# EAGLE board p8x-memory-card-full (EAGLE 9.6.2)
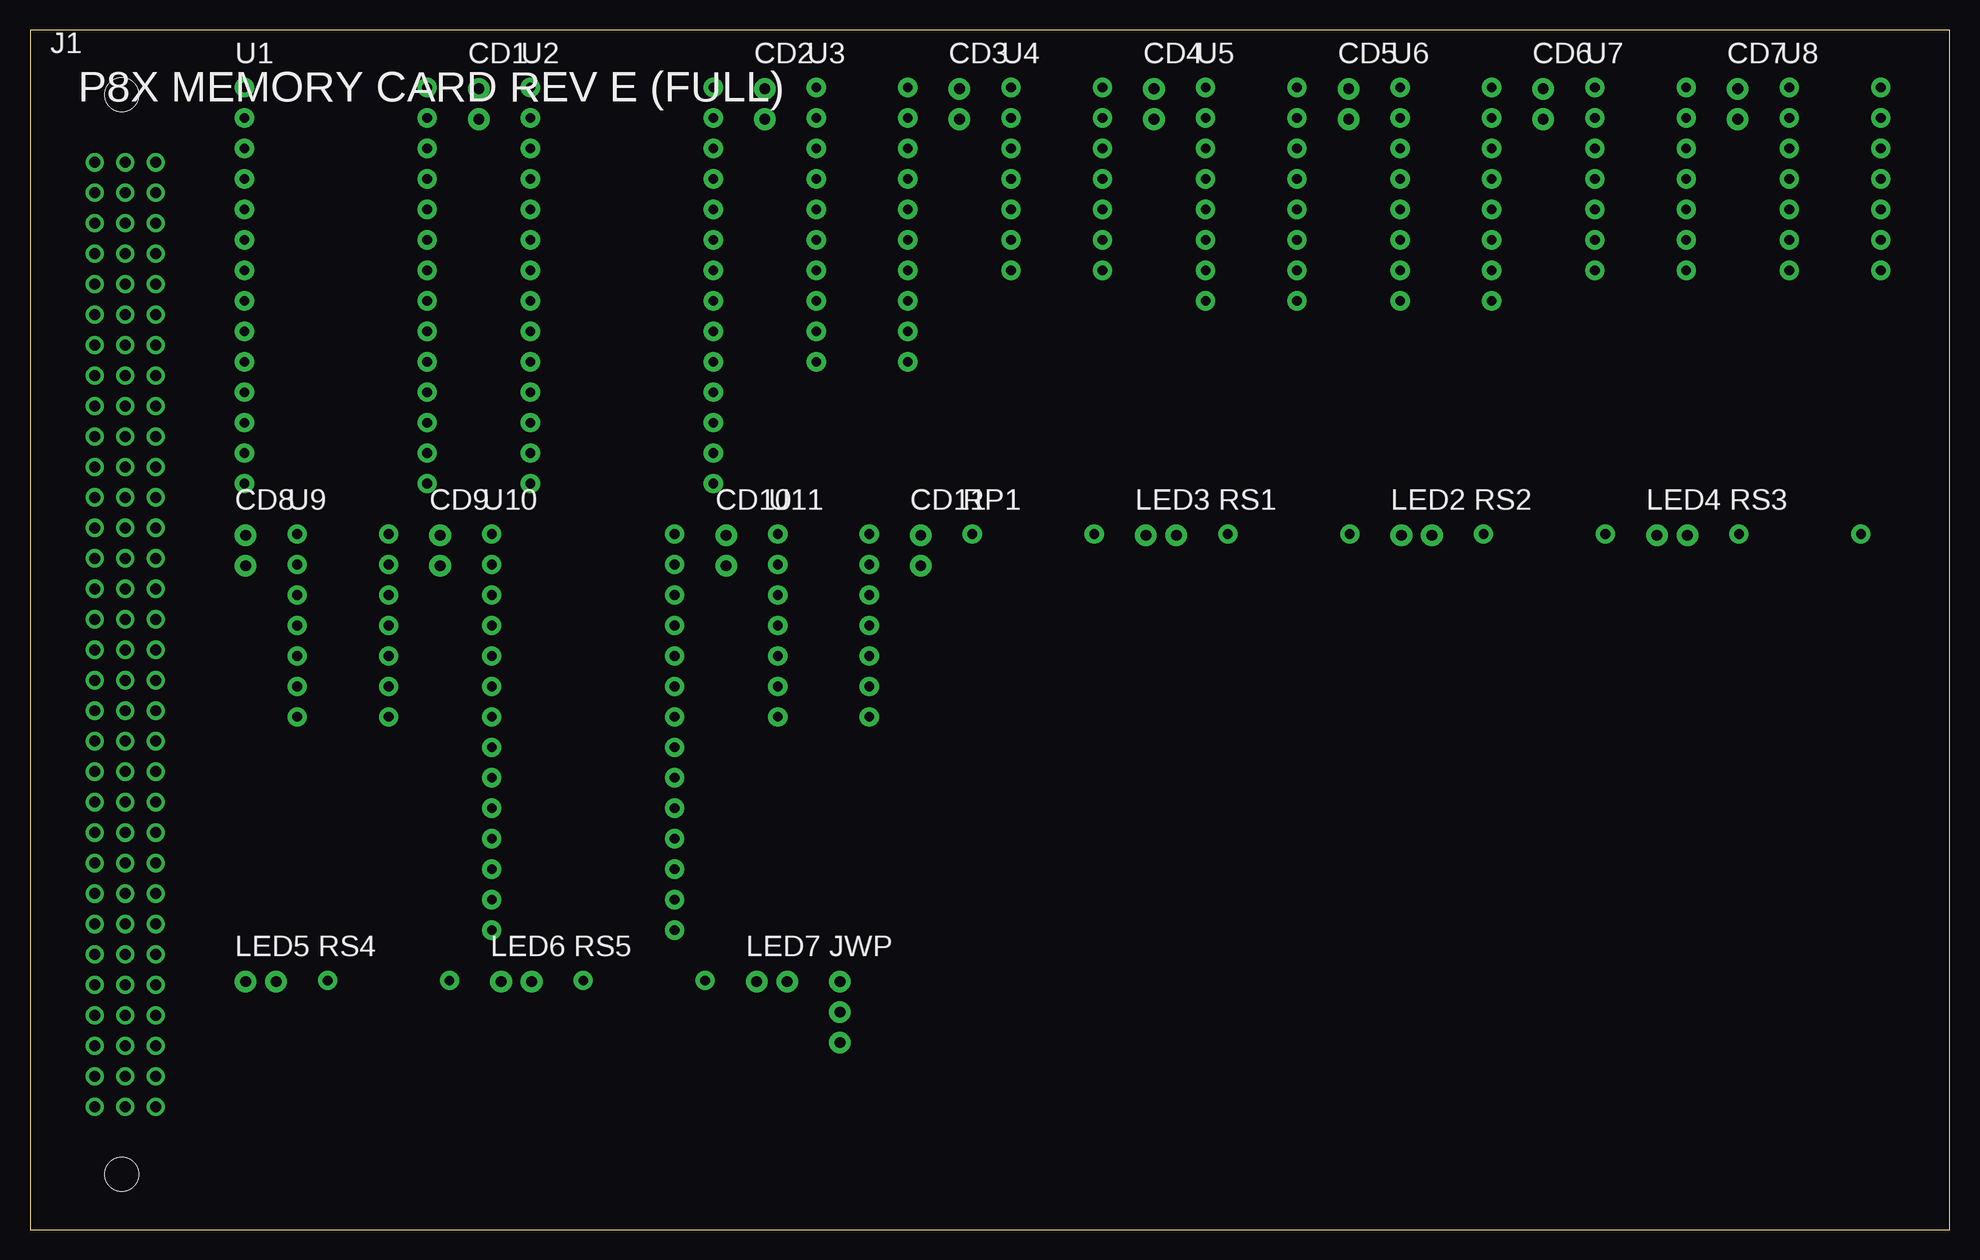
[diagram p0: board, top side]
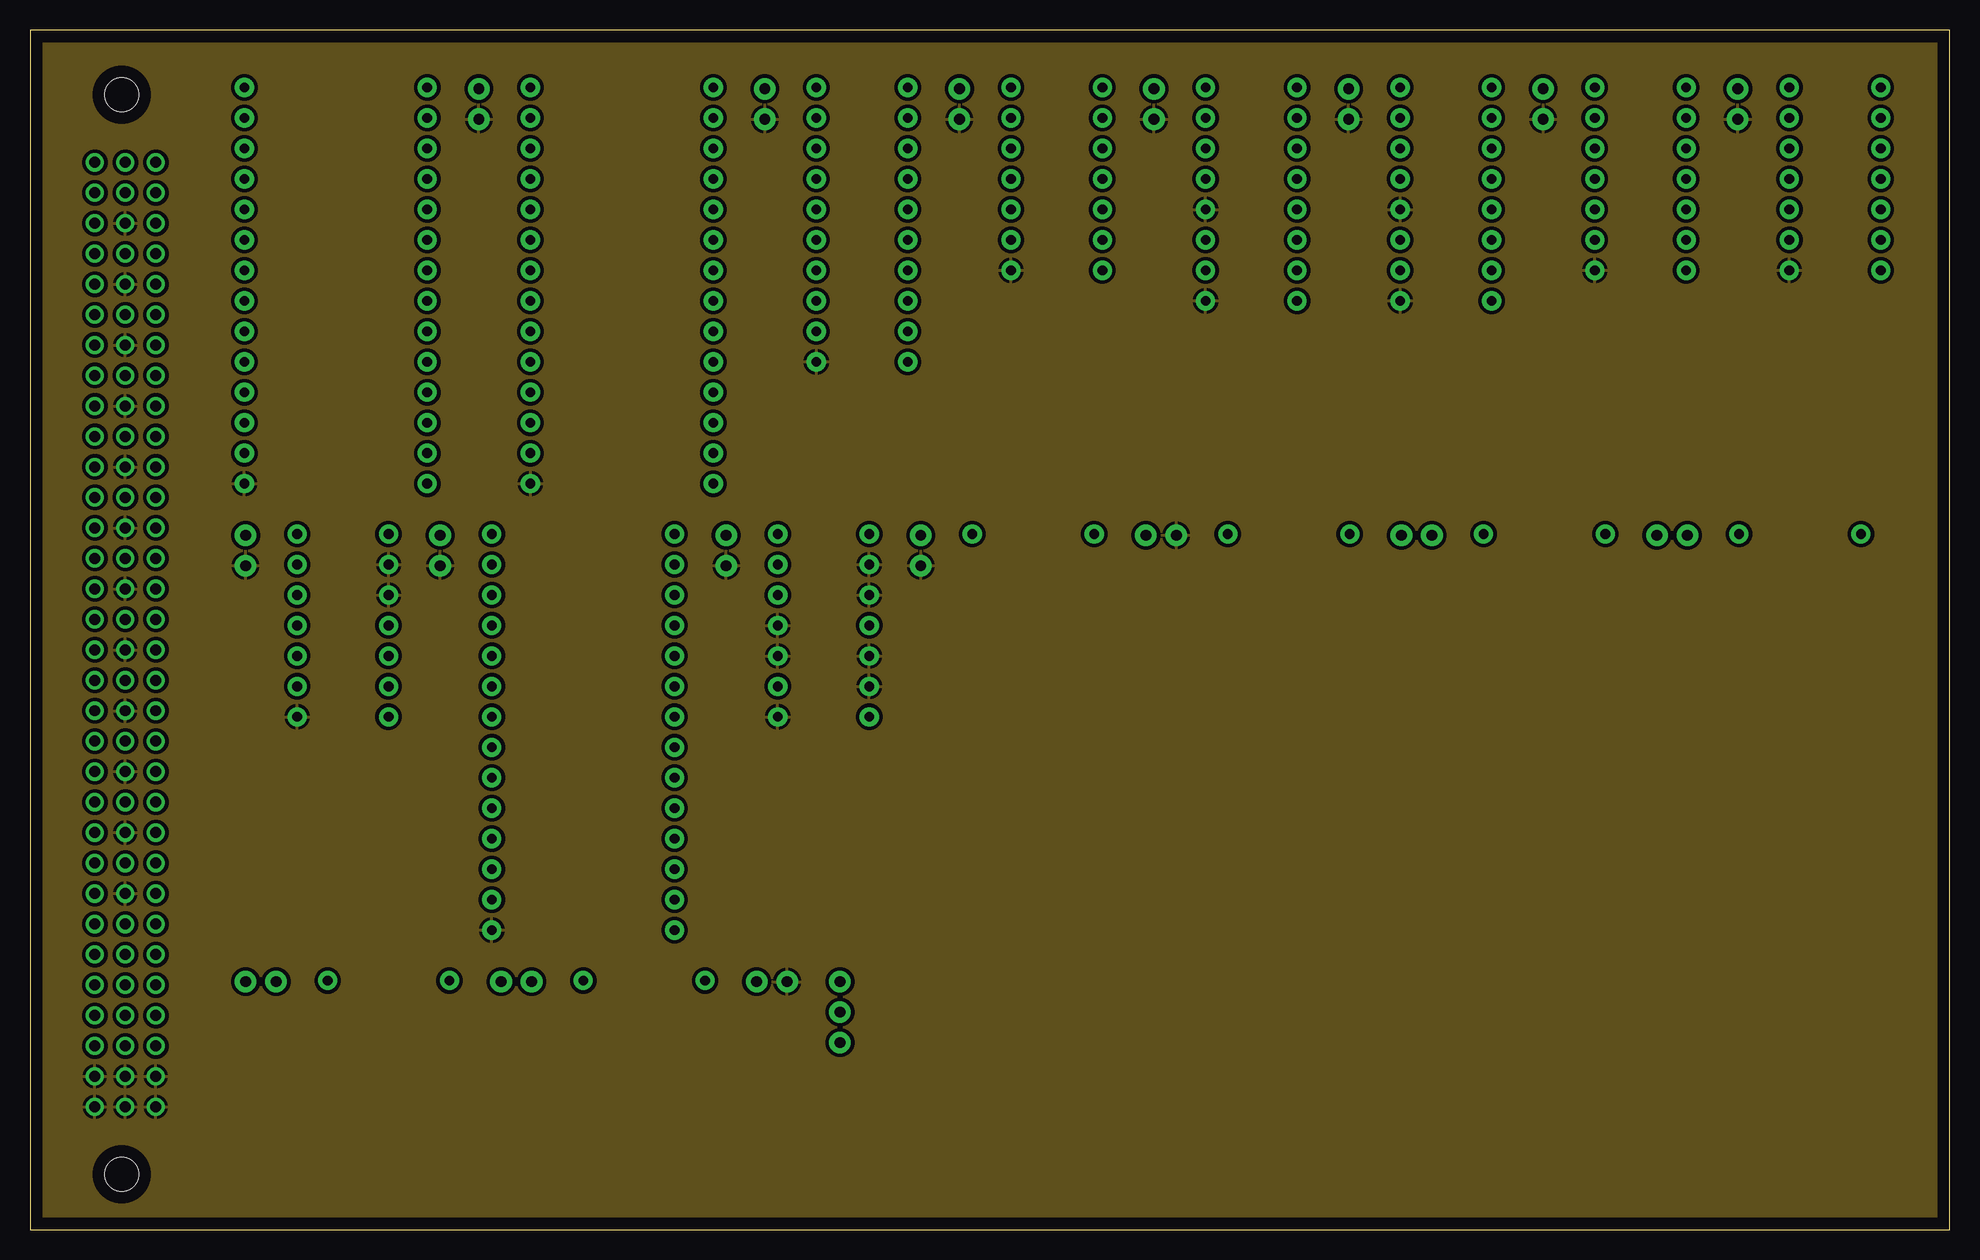
[diagram p1: board, inner layer Route2]
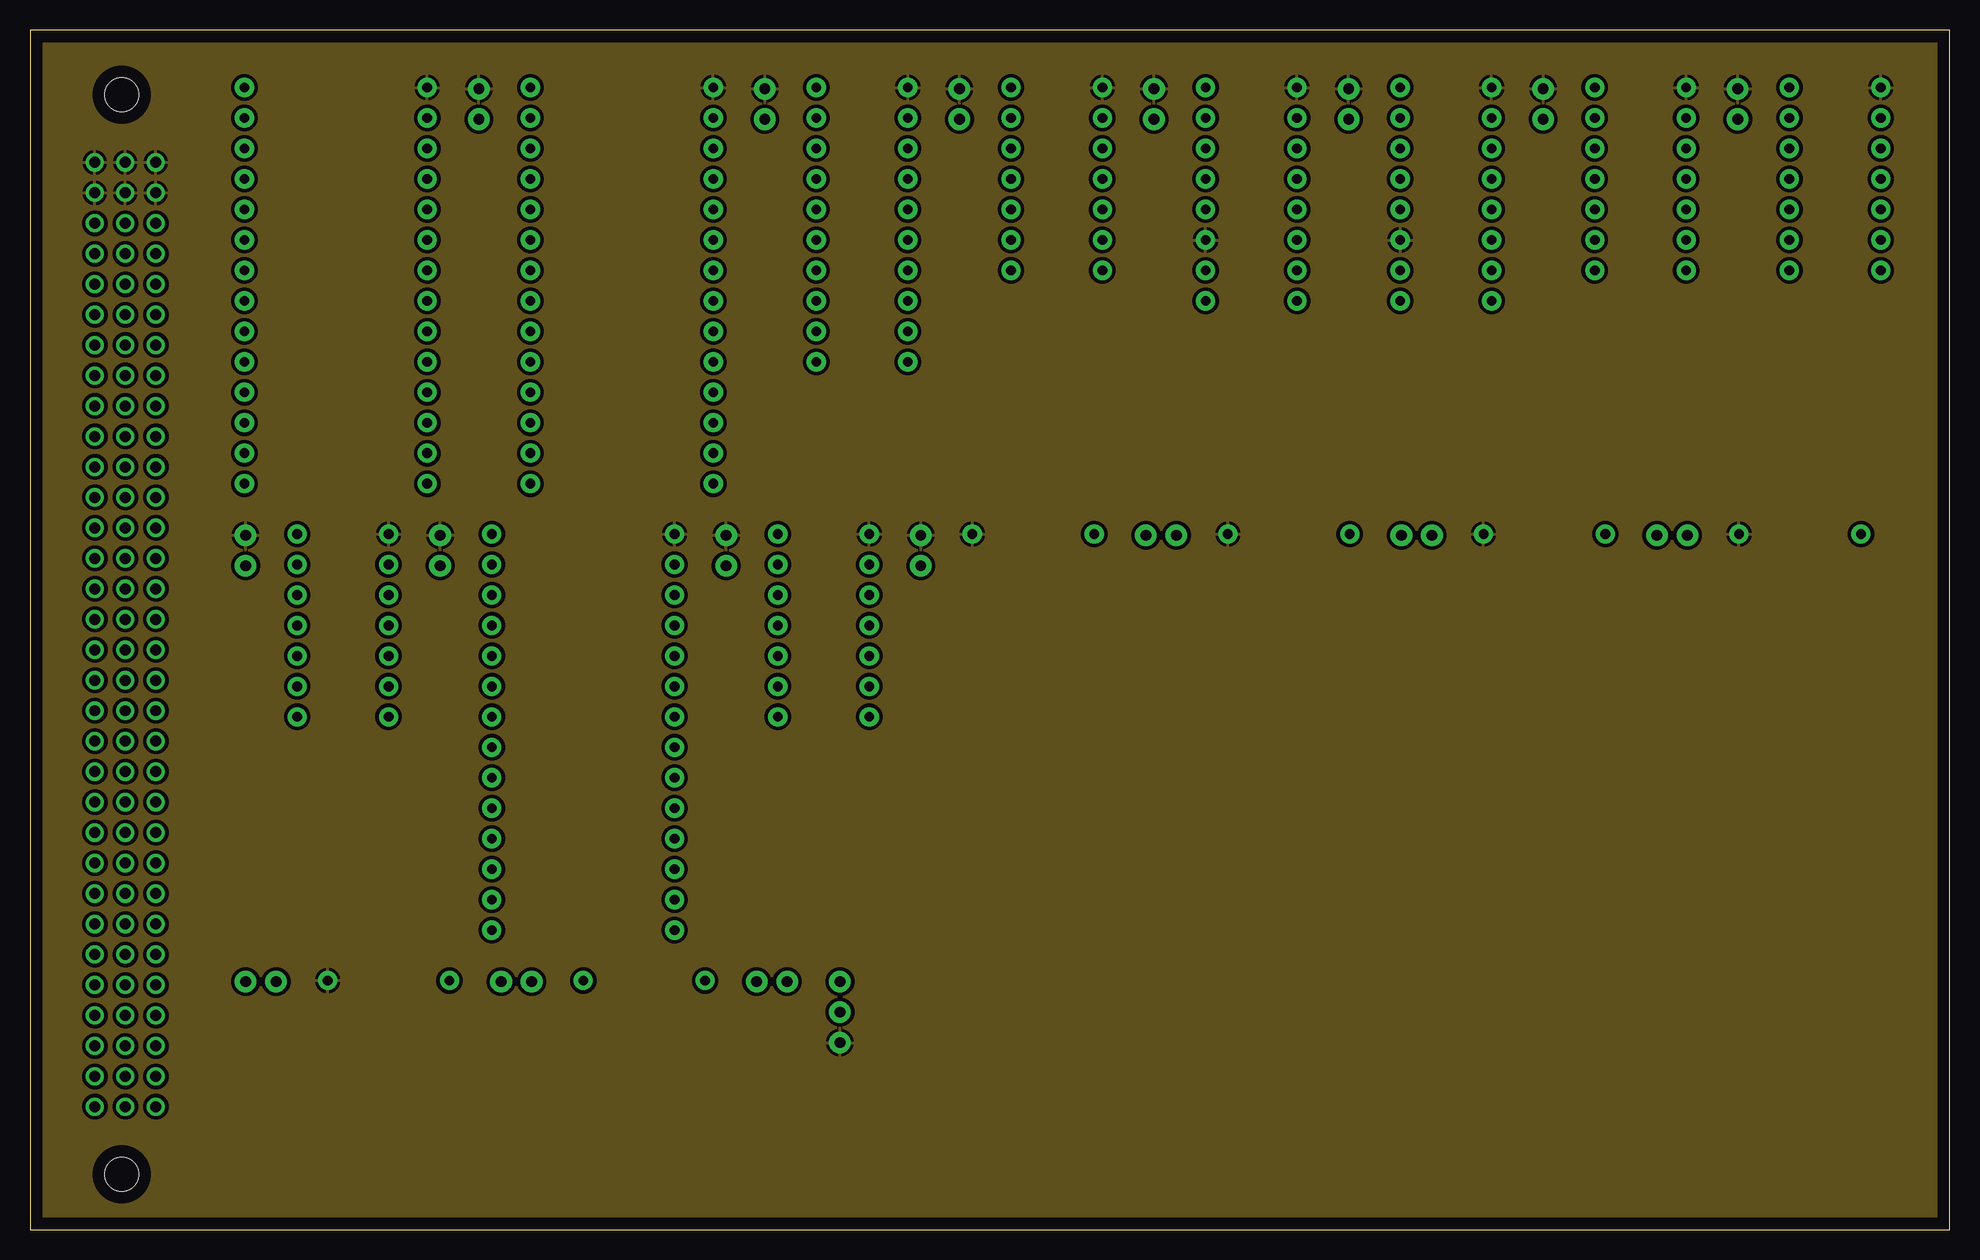
[diagram p2: board, inner layer Route15]

Size 160 x 100 mm. Coordinates in mm from the lower left corner, seen from the top.
Outline: 0,0 160,0 160,100 0,100 0,0
Copper layers (1*2*15*16): Top / Route2 / Route15 / Bottom

## Footprints (pad centres in the part's own frame; a part is rotated, then mirrored left to right if it is on the bottom)
C_DISC1 = drill 0.9 pad 1.8: 1 0,0; 2 0,-2.54
MABC96R = drill 0.914 pad 1.524: A1 -2.54,39.37; A2 -2.54,36.83; A3 -2.54,34.29; A4 -2.54,31.75; A5 -2.54,29.21; A6 -2.54,26.67; A7 -2.54,24.13; A8 -2.54,21.59; A9 -2.54,19.05; A10 -2.54,16.51; A11 -2.54,13.97; A12 -2.54,11.43; A13 -2.54,8.89; A14 -2.54,6.35; A15 -2.54,3.81; A16 -2.54,1.27; A17 -2.54,-1.27; A18 -2.54,-3.81; A19 -2.54,-6.35; A20 -2.54,-8.89; A21 -2.54,-11.43; A22 -2.54,-13.97; A23 -2.54,-16.51; A24 -2.54,-19.05; A25 -2.54,-21.59; A26 -2.54,-24.13; A27 -2.54,-26.67; A28 -2.54,-29.21; A29 -2.54,-31.75; A30 -2.54,-34.29; A31 -2.54,-36.83; A32 -2.54,-39.37; B1 0,39.37; B2 0,36.83; B3 0,34.29; B4 0,31.75; B5 0,29.21; B6 0,26.67; B7 0,24.13; B8 0,21.59; B9 0,19.05; B10 0,16.51; B11 0,13.97; B12 0,11.43; B13 0,8.89; B14 0,6.35; B15 0,3.81; B16 0,1.27; B17 0,-1.27; B18 0,-3.81; B19 0,-6.35; B20 0,-8.89; B21 0,-11.43; B22 0,-13.97; B23 0,-16.51; B24 0,-19.05; B25 0,-21.59; B26 0,-24.13; B27 0,-26.67; B28 0,-29.21; B29 0,-31.75; B30 0,-34.29; B31 0,-36.83; B32 0,-39.37; C1 2.54,39.37; C2 2.54,36.83; C3 2.54,34.29; C4 2.54,31.75; C5 2.54,29.21; C6 2.54,26.67; C7 2.54,24.13; C8 2.54,21.59; C9 2.54,19.05; C10 2.54,16.51; C11 2.54,13.97; C12 2.54,11.43; C13 2.54,8.89; C14 2.54,6.35; C15 2.54,3.81; C16 2.54,1.27; C17 2.54,-1.27; C18 2.54,-3.81; C19 2.54,-6.35; C20 2.54,-8.89; C21 2.54,-11.43; C22 2.54,-13.97; C23 2.54,-16.51; C24 2.54,-19.05; C25 2.54,-21.59; C26 2.54,-24.13; C27 2.54,-26.67; C28 2.54,-29.21; C29 2.54,-31.75; C30 2.54,-34.29; C31 2.54,-36.83; C32 2.54,-39.37 | hole 2.794: -0.3,45; -0.3,-45
HDR3 = drill 0.9 pad 1.8: 1 0,0; 2 0,-2.54; 3 0,-5.08
LED5 = drill 0.9 pad 1.8: 1 2.54,0; 2 0,0
R_AXIAL = drill 0.8 pad 1.6: 1 0,0; 2 10.16,0
DIP28W = drill 0.813 pad 1.6: 1 0,0; 2 0,-2.54; 3 0,-5.08; 4 0,-7.62; 5 0,-10.16; 6 0,-12.7; 7 0,-15.24; 8 0,-17.78; 9 0,-20.32; 10 0,-22.86; 11 0,-25.4; 12 0,-27.94; 13 0,-30.48; 14 0,-33.02; 15 15.24,-33.02; 16 15.24,-30.48; 17 15.24,-27.94; 18 15.24,-25.4; 19 15.24,-22.86; 20 15.24,-20.32; 21 15.24,-17.78; 22 15.24,-15.24; 23 15.24,-12.7; 24 15.24,-10.16; 25 15.24,-7.62; 26 15.24,-5.08; 27 15.24,-2.54; 28 15.24,0
DIP20 = drill 0.813 pad 1.6: 1 0,0; 2 0,-2.54; 3 0,-5.08; 4 0,-7.62; 5 0,-10.16; 6 0,-12.7; 7 0,-15.24; 8 0,-17.78; 9 0,-20.32; 10 0,-22.86; 11 7.62,-22.86; 12 7.62,-20.32; 13 7.62,-17.78; 14 7.62,-15.24; 15 7.62,-12.7; 16 7.62,-10.16; 17 7.62,-7.62; 18 7.62,-5.08; 19 7.62,-2.54; 20 7.62,0
DIP14 = drill 0.813 pad 1.6: 1 0,0; 2 0,-2.54; 3 0,-5.08; 4 0,-7.62; 5 0,-10.16; 6 0,-12.7; 7 0,-15.24; 8 7.62,-15.24; 9 7.62,-12.7; 10 7.62,-10.16; 11 7.62,-7.62; 12 7.62,-5.08; 13 7.62,-2.54; 14 7.62,0
DIP16 = drill 0.813 pad 1.6: 1 0,0; 2 0,-2.54; 3 0,-5.08; 4 0,-7.62; 5 0,-10.16; 6 0,-12.7; 7 0,-15.24; 8 0,-17.78; 9 7.62,-17.78; 10 7.62,-15.24; 11 7.62,-12.7; 12 7.62,-10.16; 13 7.62,-7.62; 14 7.62,-5.08; 15 7.62,-2.54; 16 7.62,0

## Placement (x,y rotation side)
CD1  100nF  [C_DISC1]  37.41,95.1 0 top
CD2  100nF  [C_DISC1]  61.25,95.1 0 top
CD3  100nF  [C_DISC1]  77.47,95.1 0 top
CD4  100nF  [C_DISC1]  93.69,95.1 0 top
CD5  100nF  [C_DISC1]  109.91,95.1 0 top
CD6  100nF  [C_DISC1]  126.13,95.1 0 top
CD7  100nF  [C_DISC1]  142.35,95.1 0 top
CD8  100nF  [C_DISC1]  17.97,57.88 0 top
CD9  100nF  [C_DISC1]  34.19,57.88 0 top
CD10  100nF  [C_DISC1]  58.03,57.88 0 top
CD11  100nF  [C_DISC1]  74.25,57.88 0 top
J1  MABC96R  [MABC96R]  7.94,49.6 0 top
JWP  1x3  [HDR3]  67.51,20.66 0 top
LED2  YEL  [LED5]  114.31,57.88 0 top
LED3  GRN  [LED5]  93.01,57.88 0 top
LED4  YEL  [LED5]  135.61,57.88 0 top
LED5  GRN  [LED5]  17.97,20.66 0 top
LED6  RED  [LED5]  39.27,20.66 0 top
LED7  YEL  [LED5]  60.57,20.66 0 top
RP1  1K  [R_AXIAL]  78.55,57.98 0 top
RS1  1K  [R_AXIAL]  99.85,57.98 0 top
RS2  1K  [R_AXIAL]  121.15,57.98 0 top
RS3  1K  [R_AXIAL]  142.45,57.98 0 top
RS4  1K  [R_AXIAL]  24.81,20.76 0 top
RS5  1K  [R_AXIAL]  46.11,20.76 0 top
U1  28C256  [DIP28W]  17.87,95.2 0 top
U2  62256  [DIP28W]  41.71,95.2 0 top
U3  74HCT245  [DIP20]  65.55,95.2 0 top
U4  74HCT30  [DIP14]  81.77,95.2 0 top
U5  74HCT138  [DIP16]  97.99,95.2 0 top
U6  74HCT138  [DIP16]  114.21,95.2 0 top
U7  74HCT00  [DIP14]  130.43,95.2 0 top
U8  74HCT32  [DIP14]  146.65,95.2 0 top
U9  74HCT08  [DIP14]  22.27,57.98 0 top
U10  62256  [DIP28W]  38.49,57.98 0 top
U11  74HCT32  [DIP14]  62.33,57.98 0 top

## Library data of the parts
CD1-CD11 J1 JWP LED2-LED7 RP1 RS1-RS5 U1-U11 = p8x

## Nets
-BOE: U3.19 U8.5 U8.10 U9.3
-IOPG: U4.8 U7.2
-MEMW: U6.7 U8.1 U9.2 U9.9 U9.10
-RAM2CE: U7.8 U7.12 U7.13 U10.20
-RAMCE: U2.20 U7.3 U8.4
-RD: U1.22 U2.22 U3.1 U5.7 U9.1 U9.4 U9.5 U10.22
-WE: JWP.1 U2.27 U8.3 U10.27
A0: J1.C3 U1.10 U2.10 U10.10
A1: J1.C4 U1.9 U2.9 U10.9
A2: J1.C5 U1.8 U2.8 U10.8
A3: J1.C6 U1.7 U2.7 U10.7
A4: J1.C7 U1.6 U2.6 U10.6
A5: J1.C8 U1.5 U2.5 U10.5
A6: J1.C9 U1.4 U2.4 U10.4
A7: J1.C10 U1.3 U2.3 U10.3
A8: J1.C11 U1.25 U2.25 U4.1 U10.25
A9: J1.C12 U1.24 U2.24 U4.2 U10.24
A10: J1.C13 U1.21 U2.21 U4.3 U10.21
A11: J1.C14 U1.23 U2.23 U4.4 U10.23
A12: J1.C15 U1.2 U2.2 U4.5 U10.2
A13: J1.C16 U1.26 U2.26 U4.6 U8.12 U10.26
A14: J1.C17 U1.1 U2.1 U4.11 U8.13 U10.1
A15: J1.C18 U4.12 U7.1 U7.4 U7.5 U11.2
A15N: U7.6 U7.9
CLK: J1.A24 U8.2
D0: J1.A3 U3.2
D1: J1.A4 U3.3
D2: J1.A5 U3.4
D3: J1.A6 U3.5
D4: J1.A7 U3.6
D5: J1.A8 U3.7
D6: J1.A9 U3.8
D7: J1.A10 U3.9
DLD0: J1.A16 U6.1
DLD1: J1.A17 U6.2
DLD2: J1.A18 U6.3
DLD3: J1.A19 U6.4
DOE0: J1.A12 U5.1
DOE1: J1.A13 U5.2
DOE2: J1.A14 U5.3
DOE3: J1.A15 U5.4
GND: CD1.2 CD2.2 CD3.2 CD4.2 CD5.2 CD6.2 CD7.2 CD8.2 CD9.2 CD10.2 CD11.2 J1.A31 J1.A32 J1.B3 J1.B5 J1.B7 J1.B9 J1.B11 J1.B13 J1.B15 J1.B17 J1.B19 J1.B21 J1.B23 J1.B25 J1.B31 J1.B32 J1.C31 J1.C32 LED3.1 LED7.1 U1.14 U2.14 U3.10 U4.7 U5.5 U5.8 U6.5 U6.8 U7.7 U8.7 U9.7 U9.12 U9.13 U10.14 U11.4 U11.5 U11.7 U11.9 U11.10 U11.12 U11.13
LEDP: LED3.2 RP1.2
LEDRA: LED4.2 RS2.2
LEDRA2: LED7.2 RS5.2
LEDRD: LED5.2 RS3.2
LEDRO: LED2.2 RS1.2
LEDWR: LED6.2 RS4.2
MD0: U1.11 U2.11 U3.18 U10.11
MD1: U1.12 U2.12 U3.17 U10.12
MD2: U1.13 U2.13 U3.16 U10.13
MD3: U1.15 U2.15 U3.15 U10.15
MD4: U1.16 U2.16 U3.14 U10.16
MD5: U1.17 U2.17 U3.13 U10.17
MD6: U1.18 U2.18 U3.12 U10.18
MD7: U1.19 U2.19 U3.11 U10.19
Q: U7.10 U8.11 U11.1
RAM2ON: RS5.1 U7.11
RAMK: LED4.1 U8.6
RDK: LED5.1 U9.6
ROM8CE: U1.20 U8.9 U11.3
ROMK: LED2.1 U8.8
ROMWE: JWP.2 U1.27
VCC: CD1.1 CD2.1 CD3.1 CD4.1 CD5.1 CD6.1 CD7.1 CD8.1 CD9.1 CD10.1 CD11.1 J1.A1 J1.A2 J1.B1 J1.B2 J1.C1 J1.C2 JWP.3 RP1.1 RS1.1 RS2.1 RS3.1 RS4.1 U1.28 U2.28 U3.20 U4.14 U5.6 U5.16 U6.6 U6.16 U7.14 U8.14 U9.14 U10.28 U11.14
WRK: LED6.1 U9.8

## Tracks (layer width: path | path; a pad name or v marks a point on that pad's centre or on a via)
GND
  pour Route2 (isolate 0.3): 0,0 160,0 160,100 0,100
VCC
  pour Route15 (isolate 0.3): 0,0 160,0 160,100 0,100

## Text on the board
tPlace: P8X MEMORY CARD REV E (FULL)